# EAGLE board RoverMeter (EAGLE 6.4)
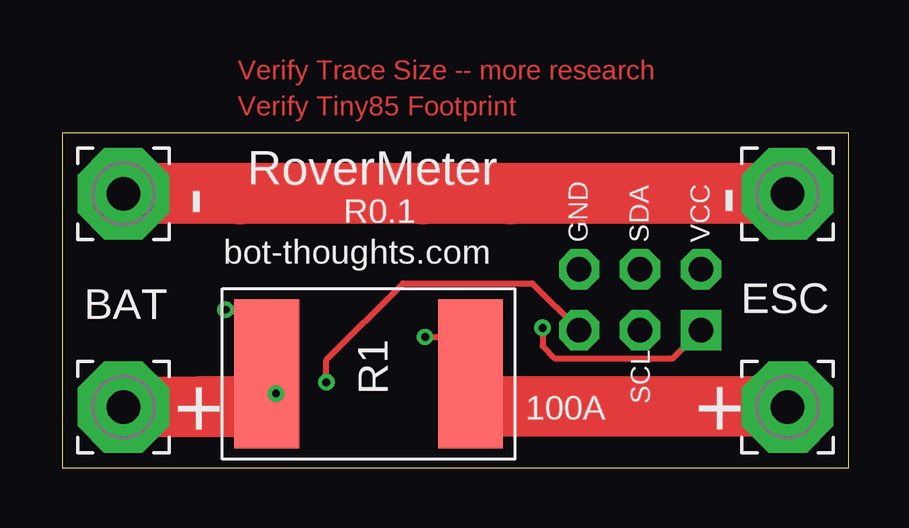
[diagram p0: board, top side]
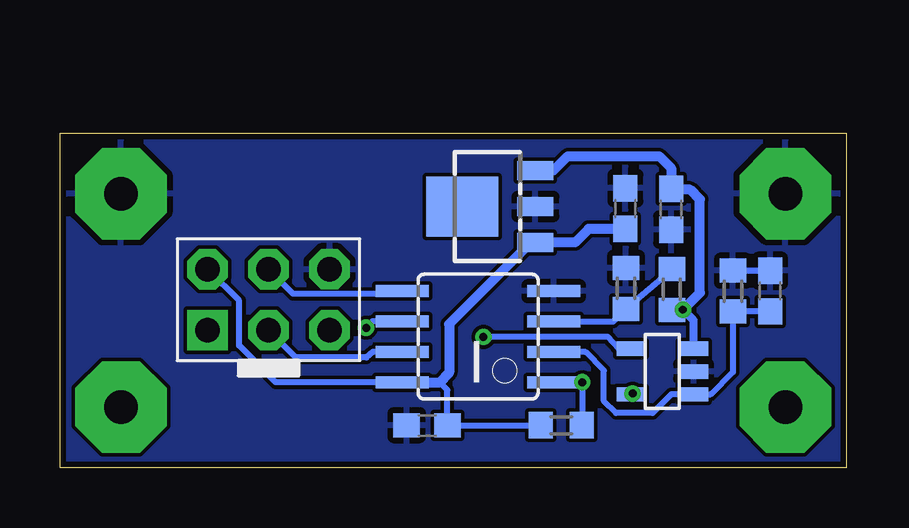
[diagram p1: board, bottom side, seen from below]

Size 32.76 x 13.97 mm. Coordinates in mm from the lower left corner, seen from the top.
Outline: 32.76,0 32.76,13.97 0,13.97 0,0 32.76,0
Copper layers (1*16): Top 0.0356mm / dielectric 1.5011mm / Bottom 0.0356mm
Design rules "LaenPCBOrder *": minimum track width 6mil, minimum drill 13mil, track to track 6mil, track to pad 6mil, pad to pad 6mil, via to via 6mil, smd to smd 6mil, copper to edge 10mil, drill to drill 6mil, minimum pad ring 7mil, minimum via ring 7mil, stop-mask expansion 4mil, vias tented up to drill 0mil, thermal gap 10mil

## Footprints (pad centres in the part's own frame; a part is rotated, then mirrored left to right if it is on the bottom)
C0603 = smd 1.1 x 1: 1 -0.85,0; 2 0.85,0
SOT23-5 = smd 0.6 x 1.2: 1 -0.95,-1.306; 2 0,-1.306; 3 0.95,-1.306; 4 0.95,1.306; 5 -0.95,1.306
SOT89 = smd 0.8 x 1.5: 1 -1.5,-1.75; 2 0,-1.75; 3 1.5,-1.75 | smd 2.5 x 3: 4 0,1.304
SOIC8 = smd 0.5 x 2.2: 1 -1.905,-3.154; 2 -0.645,-3.154; 3 0.625,-3.154; 4 1.895,-3.154; 5 1.905,3.154; 6 0.635,3.154; 7 -0.635,3.154; 8 -1.905,3.154
CON6P2R = drill 1.016 pad 1.676 square: 1 -2.54,-1.27 | drill 1.016 pad 1.676 octagon: 2 -2.54,1.27; 3 0,-1.27; 4 0,1.27; 5 2.54,-1.27; 6 2.54,1.27
3,81/1,4 = drill 1.397 pad 3.81 octagon: 1 0,0
WSLP3921 = smd 2.692 x 6.198: P$1 -4.242,0; P$2 4.242,0
R0603 = smd 1 x 1.1: 1 -0.85,0; 2 0.85,0

## Placement (x,y rotation side)
C1  104  [C0603]  3.17,7.37 90 bottom
C2  104  [C0603]  17.47,1.78 180 bottom
C3  105  [C0603]  9.2,10.82 90 bottom
C4  105  [C0603]  7.3,10.78 270 bottom
IC1  INA168  [SOT23-5]  7.67,4.02 90 bottom
IC2  KA78L05AIMTF  [SOT89]  14.7,10.9 90 bottom
IC3  TINY85  [SOIC8]  15.34,5.48 90 bottom
J1  AVRISP  [CON6P2R]  24.07,7.01 0 bottom
PAD1  BAT_V  [3,81/1,4]  2.54,2.54 0 top
PAD2  BAT_G  [3,81/1,4]  2.54,11.43 0 top
PAD3  ESC_V  [3,81/1,4]  30.22,2.54 0 top
PAD4  ESC_G  [3,81/1,4]  30.22,11.43 0 top
R1  0.001  [WSLP3921]  12.76,3.92 0 top
R2  68k  [R0603]  4.72,7.37 270 bottom
R3  51K  [R0603]  7.27,7.45 270 bottom
R4  33K  [R0603]  9.18,7.49 270 bottom
R5  10K  [R0603]  11.88,1.78 180 bottom

## Library data of the parts
C1 R3-R5 = resistor
C2-C4 R2 = rcl
IC1 = burr-brown; MF: TEXAS INSTRUMENTS; MPN: INA168NA/250; OC_FARNELL: 4375737; OC_NEWARK: 35C1744
IC2 = v-reg-3; VOLTAGE: 30V
IC3 J1 = bt_avr
PAD1-PAD4 = wirepad
R1 = bt; PARTNO: WSLP3921L5000FEB; POWER: 6W+

## Nets
5V: C2.1 C3.1 IC2.1 IC3.8 J1.2 R5.2
!RESET: IC3.1 J1.5 R5.1
AMP: C1.1 IC1.1 IC3.2 R2.2
GND: C1.2 C2.2 C3.2 C4.2 IC1.2 IC2.2 IC3.4 J1.6 PAD2.1 PAD4.1 R2.1 R4.1
MISO: IC3.6 J1.1
N$4: IC1.4 PAD3.1 R1.P$2
SCL: IC3.7 J1.3
SDA: IC3.5 J1.4
V+: C4.1 IC1.3 IC1.5 IC2.3 PAD1.1 R1.P$1 R3.2
VOLT: IC3.3 R3.1 R4.2

## Tracks (layer width: path | path; a pad name or v marks a point on that pad's centre or on a via)
5V
  Bottom 0.254: 16.94,3.57 16.62,3.24 C2.1 R5.2 | IC3.8 23.77,3.57 25.3,5.1 25.3,6.97 J1.2
  Bottom 0.406: IC3.8 16.94,3.57 16.54,3.97 16.54,6 13.14,9.4 IC2.1 11.3,9.4 10.73,9.97 C3.1
!RESET  (via drill 0.33)
  Top 0.254: v11,3.57 11,4.5 14.2,7.7 19.57,7.7 J1.5
  Bottom 0.254: IC3.1 v11,3.57 11,1.81 R5.1
AMP
  Bottom 0.254: C1.1 R2.2 4.72,4 5.65,3.07 IC1.1 7.29,3.07 8.07,2.29 9.59,2.29 10.1,2.79 10.1,4.06 10.86,4.83 IC3.2
GND
  Top 0.254: 18.66,11.43 21.41,11.4 21.56,11.25 | 7.3,11.33 7.4,11.43
  Top 0.406: 15,11.39 15,11.43
  Top 2.54: PAD4.1 18.66,11.43 15,11.43 7.4,11.43 PAD2.1 2.44,11.43
  Bottom 0.254: R2.1 C1.2 | C4.2 7.3,10
  Bottom 0.33: C4.2 7.3,9.91
  pour Bottom: 0,13.97 32.76,13.97 32.76,0 0,0
MISO  (via drill 0.33)
  Top 0.254: v20.01,5.84 20.01,5.08 20.51,4.57 25.44,4.57 J1.1
  Bottom 0.254: IC3.6 19.74,6.11 v20.01,5.84
N$4  (via drill 0.33)
  Top 0.254: v15.12,5.46 16.37,5.46 R1.P$2
  Top 2.54: PAD3.1 17.42,2.56 R1.P$2
  Bottom 0.254: IC1.4 9.49,4.97 9.94,5.46 v15.12,5.46
SCL
  Bottom 0.254: IC3.7 19.73,4.84 19.99,4.6 22.93,4.6 J1.3
SDA
  Bottom 0.254: IC3.5 19.46,7.38 19.59,7.25 23.04,7.25 J1.4
V+  (via drill 0.33)
  Top 0.33: v8.9,3.1 R1.P$1
  Top 0.406: v6.8,6.59 8.2,6.6 8.2,3.92 R1.P$1
  Top 2.54: PAD1.1 5.75,2.56 8.23,2.56 R1.P$1
  Bottom 0.254: IC1.5 9.3,3.07
  Bottom 0.33: IC1.5 v8.9,3.1 | IC1.3 6.36,6.15 v6.8,6.59
  Bottom 0.406: IC2.3 12.2,12.4 11.6,13 7.8,13 7.3,12.5 C4.1 7.27,11.6 6.5,11.6 6.1,11.2 6.1,7.3 v6.8,6.59 R3.2
VOLT
  Bottom 0.254: R3.1 7.27,8.25 R4.2 9.71,6.1 IC3.3

## Text on the board
Top: Verify Trace Size -- more research | Verify Tiny85 Footprint
tPlace: 100A
tNames: RoverMeter | - | - | R0.1 | GND | SDA | VCC | bot-thoughts.com | ESC | BAT | SCL | + | +
bNames: I